# EAGLE board (Eagle)PowerUnit-Bseries(ver1.0)_bak (EAGLE 9.6.2)

Size 100 x 100 mm. Coordinates in mm from the lower left corner, seen from the top.
Outline: 0,0 100,0 100,100 0,100 0,0
Copper layers (1*16): Top 0.035559375mm / dielectric 1.6mm / Bottom 0.035559375mm
Design rules "jlcpcb2layer": minimum track width 5mil, minimum drill 12mil, track to track 5mil, track to pad 5mil, pad to pad 5mil, via to via 5mil, smd to smd 5mil, copper to edge 8mil, drill to drill 6mil, minimum pad ring 5mil, minimum via ring 3mil, stop-mask expansion 2.5mil, vias tented up to drill 0mil, thermal gap 10mil

## Footprints (pad centres in the part's own frame; a part is rotated, then mirrored left to right if it is on the bottom)
CS11029.5F100 = smd 1.5 x 1.3: 1 -3.95,2.25; 2 3.95,2.25; 3 -3.95,-2.25; 4 3.95,-2.25
1X02 = drill 1.016 long: 1 -1.27,0; 2 1.27,0
50ZLH1000MEFC16X25 = drill 1: A 3.75,0; C -3.75,0
GCM188L81H104KA57 = smd 0.7 x 0.8: P$1 -0.7,0; P$2 0.7,0
GRM32ER71H106KA12 = smd 1.2 x 2.3: L -1.7,0; R 1.7,0
A768EB566M1VLAE042 = smd 3.5 x 1.6: ANODE 2.7,0; CATHODE -2.7,0
3225M = smd 1.2 x 2.3: L -1.7,0; R 1.7,0
GRM0335C1H120GA01 = smd 0.25 x 0.3: 1 -0.275,0; 2 0.275,0
GRM21BC72A105KE01 = smd 0.8 x 1.4: P$1 -1,0; P$2 1,0
GRM31CR71H475KA12 = smd 1.2 x 1.7: 1 -1.6,0; 2 1.6,0
GRM0335C1E240GA01D = smd 0.35 x 0.4: 1 -0.325,0; 2 0.325,0
XT90PW-M = drill 4.1 pad 6.15: + 5.45,0; - -5.45,0 | drill 1.8 pad 2.7: P$3 -9.45,8.9; P$4 9.45,8.9
XT90PW-F = drill 4.1 pad 6.15: + -5.45,0; - 5.45,0 | drill 1.8 pad 2.7: P$3 -9.45,8.9; P$4 9.45,8.9
XT60PW-F = drill 2.9 pad 4.35: + -3.6,0; - 3.6,0 | drill 1.9 pad 2.85: P$3 -6.75,6; P$4 6.75,6
B2B-XH = drill 1 square: 1 1.27,0 | drill 1: 2 -1.27,0
GS1010FL = smd 0.78 x 1.22: A 3.48,0; C 0,0
10046971-019LF = drill 1.3: P$1 -30.48,-2.54; P$2 -27.94,-2.54; P$3 -25.4,-2.54; P$4 -22.86,-2.54; P$5 -20.32,-2.54; P$6 -17.78,-2.54; P$7 -15.24,-2.54; P$8 -12.7,-2.54; P$9 -10.16,-2.54; P$10 -7.62,-2.54; P$11 -5.08,-2.54; P$12 -2.54,-2.54; P$13 0,-2.54; P$14 2.54,-2.54; P$15 5.08,-2.54; P$16 7.62,-2.54; P$17 10.16,-2.54; P$18 12.7,-2.54; P$19 15.24,-2.54; P$20 17.78,-2.54; P$21 20.32,-2.54; P$22 22.86,-2.54; P$23 25.4,-2.54; P$24 27.94,-2.54; P$25 30.48,-2.54; P$26 30.48,2.54; P$27 27.94,2.54; P$28 25.4,2.54; P$29 22.86,2.54; P$30 20.32,2.54; P$31 17.78,2.54; P$32 15.24,2.54; P$33 12.7,2.54; P$34 10.16,2.54; P$35 7.62,2.54; P$36 5.08,2.54; P$37 2.54,2.54; P$38 0,2.54; P$39 -2.54,2.54; P$40 -5.08,2.54; P$41 -7.62,2.54; P$42 -10.16,2.54; P$43 -12.7,2.54; P$44 -15.24,2.54; P$45 -17.78,2.54; P$46 -20.32,2.54; P$47 -22.86,2.54; P$48 -25.4,2.54; P$49 -27.94,2.54; P$50 -30.48,2.54
BLM18KG121TN1D = smd 0.65 x 1.2: 1 -0.675,0; 2 0.675,0
3,2 = drill 3.197 pad 7.01: P$1 0,0 | hole 3.2: 0,0
TO-220AB-PUT = drill 0.8 long: D 0,-5.08; G -2.54,-5.08; S 2.54,-5.08 | smd 11.938 x 12.7: P$1 0,8.915
B5B-XH = drill 1 square: 1 5.08,0 | drill 1: 2 2.54,0; 3 0,0; 4 -2.54,0; 5 -5.08,0
NRS5030T4R7MMGJ = smd 1.5 x 4: L -1.8,0; R 1.8,0
LED5MM = drill 0.813 octagon: A -1.27,0; K 1.27,0
SML-E12V8WT86 = smd 0.8 x 0.8: A 0,1.65; K 0,0
P-SWITCH = drill 0.8: P$1 0,-2.54; P$2 0,7.62
SOT-23F = smd 0.8 x 0.9: D 0,1.05; G -0.95,-1.05; S 0.95,-1.05
0204/7 = drill 0.813 octagon: 1 -3.81,0; 2 3.81,0
CR0603 = smd 1 x 1.2: LEFT -1,0; RIGHT 1,0
B6B-XH = drill 1 square: 1 6.35,0 | drill 1: 2 3.81,0; 3 1.27,0; 4 -1.27,0; 5 -3.81,0; 6 -6.35,0
SS-12SDP2 = drill 0.8 pad 1.3: C 0,0; L -2.54,0; R 2.54,0
RDS-16S-1055-SMT-TR = smd 2.7 x 1: 1 -6.35,2.54; 2 6.35,-2.54; 4 -6.35,-2.54; 8 6.35,2.54; C1 -6.35,0; C2 6.35,0
2227MC-08-03 = drill 0.8: P$1 -3.81,-3.81; P$2 -1.27,-3.81; P$3 1.27,-3.81; P$4 3.81,-3.81; P$5 3.81,3.81; P$6 1.27,3.81; P$7 -1.27,3.81; P$8 -3.81,3.81
STM32F446XC = smd 0.3 x 1.2: P1 -3.75,-5.75; P2 -3.25,-5.75; P3 -2.75,-5.75; P4 -2.25,-5.75; P5 -1.75,-5.75; P6 -1.25,-5.75; P7 -0.75,-5.75; P8 -0.25,-5.75; P9 0.25,-5.75; P10 0.75,-5.75; P11 1.25,-5.75; P12 1.75,-5.75; P13 2.25,-5.75; P14 2.75,-5.75; P15 3.25,-5.75; P16 3.75,-5.75; P33 3.75,5.75; P34 3.25,5.75; P35 2.75,5.75; P36 2.25,5.75; P37 1.75,5.75; P38 1.25,5.75; P39 0.75,5.75; P40 0.25,5.75; P41 -0.25,5.75; P42 -0.75,5.75; P43 -1.25,5.75; P44 -1.75,5.75; P45 -2.25,5.75; P46 -2.75,5.75; P47 -3.25,5.75; P48 -3.75,5.75 | smd 1.2 x 0.3: P17 5.75,-3.75; P18 5.75,-3.25; P19 5.75,-2.75; P20 5.75,-2.25; P21 5.75,-1.75; P22 5.75,-1.25; P23 5.75,-0.75; P24 5.75,-0.25; P25 5.75,0.25; P26 5.75,0.75; P27 5.75,1.25; P28 5.75,1.75; P29 5.75,2.25; P30 5.75,2.75; P31 5.75,3.25; P32 5.75,3.75; P49 -5.75,3.75; P50 -5.75,3.25; P51 -5.75,2.75; P52 -5.75,2.25; P53 -5.75,1.75; P54 -5.75,1.25; P55 -5.75,0.75; P56 -5.75,0.25; P57 -5.75,-0.25; P58 -5.75,-0.75; P59 -5.75,-1.25; P60 -5.75,-1.75; P61 -5.75,-2.25; P62 -5.75,-2.75; P63 -5.75,-3.25; P64 -5.75,-3.75
MCP2517FD = smd 0.6 x 1.55: CLKO/SOF 2.54,0; INT 3.81,0; INT0/GPIO0 6.35,5.4; INT1/GPIO1 7.62,5.4; NCS 1.27,5.4; OSC1 6.35,0; OSC2 5.08,0; RXCAN 1.27,0; SCK 5.08,5.4; SDI 3.81,5.4; SDO 2.54,5.4; TXCAN 0,0; VDD 0,5.4; VSS 7.62,0
MSOP-10 = smd 0.3 x 1.35: 3V3 -1,1.975; CTS# 1,-1.975; GND 0,-1.975; RTS# 0.5,-1.975; RXD -0.5,1.975; TNOW 1,1.975; TXD 0,1.975; UD+ -1,-1.975; UD- -0.5,-1.975; VCC 0.5,1.975
AP63203WU-7 = smd 0.7 x 1: BST -0.95,1.099; EN 0,-1.099; FB -0.95,-1.099; GND 0.95,1.099; SW 0,1.099; VIN 0.95,-1.099
SOT25 = smd 0.6 x 1.05: GND 0,-1.35; IN+ -0.95,-1.35; IN- 0.95,-1.35; OUTPUT 0.95,1.35; VCC -0.95,1.35
MCP2558FD = smd 0.25 x 0.85: CANH -0.25,1.45; CANL 0.25,1.45; RXD 0.75,-1.45; S -0.75,1.45; TXD -0.75,-1.45; VDD 0.25,-1.45; VIO 0.75,1.45; VSS -0.25,-1.45 | smd 1.65 x 1.8: EP 0,0
AZ1117C = smd 1.2 x 2.2: GND -2.3,-3.1; INPUT 2.3,-3.1; OUTPUT 0,-3.1 | smd 3.5 x 2.2: VOUT 0,3.1
5077CR-16SMC2-BK-TR = smd 0.3 x 1.1: CC1 -1.25,4.74; CC2 1.75,4.74; DN1 0.25,4.74; DN2 -0.75,4.74; DP1 -0.25,4.74; DP2 0.75,4.74; SBU1 1.25,4.74; SBU2 -1.75,4.74 | smd 0.6 x 1.1: GND1 -3.2,4.74; GND2 3.2,4.74; VBUS1 -2.4,4.74; VBUS2 2.4,4.74 | smd 1.1 x 2.1: SHIELD1 -4.32,4.18; SHIELD2 -4.32,0; SHIELD3 4.32,0; SHIELD4 4.32,4.18 | hole 0.6: -2.89,3.68; 2.89,3.68
XRCGB40M000F4M00R0 = smd 0.75 x 0.7: 1 -0.675,-0.5; 2 0.675,0.5; NC1 -0.675,0.5; NC2 0.675,-0.5
RH100-24.000-18-1020-EXT-TR = smd 1.4 x 1.1: 1 -1.1,-0.8; 2 1.1,-0.8; 3 1.1,0.8; 4 -1.1,0.8
32.768K12.5PI/MC306 = smd 1.3 x 1.9: 1 -2.75,-1.6; 2 2.75,-1.6; 3 2.75,1.6; 4 -2.75,1.6

## Placement (x,y rotation side)
B1  CS11029.5F100  [CS11029.5F100]  93.98,62.23 0 top
BOOTMODE  [1X02]  92.71,69.85 0 top
C1  50ZLH1000MEFC16X25  [50ZLH1000MEFC16X25]  -68.58,11.43 0 top  (outside the outline)
C2  GCM188L81H104KA57  [GCM188L81H104KA57]  -19.05,113.03 0 top  (outside the outline)
C3  GCM188L81H104KA57  [GCM188L81H104KA57]  24.13,45.72 0 top
C4  GRM32ER71H106KA12  [GRM32ER71H106KA12]  60.96,60.96 0 top
C5  GRM32ER71H106KA12  [GRM32ER71H106KA12]  60.96,57.15 0 top
C6  GCM188L81H104KA57  [GCM188L81H104KA57]  13.97,46.99 0 top
C7  A768EB566M1VLAE042  [A768EB566M1VLAE042]  21.59,62.23 90 top
C8  GCM188L81H104KA57  [GCM188L81H104KA57]  63.5,63.5 0 top
C9  GRM32ER71E226KE15  [3225M]  35.56,57.15 0 top
C10  GCM188L81H104KA57  [GCM188L81H104KA57]  34.29,54.61 0 top
C11  GCM188L81H104KA57  [GCM188L81H104KA57]  34.29,52.07 0 top
C12  GRM32ER71E226KE15  [3225M]  35.56,48.26 0 top
C13  GCM188L81H104KA57  [GCM188L81H104KA57]  54.61,64.77 0 top
C14  GCM188L81H104KA57  [GCM188L81H104KA57]  69.85,26.67 0 top
C15  GCM188L81H104KA57  [GCM188L81H104KA57]  69.85,24.13 0 top
C16  GRM0335C1H120GA01  [GRM0335C1H120GA01]  71.12,21.59 0 top
C17  GRM0335C1H120GA01  [GRM0335C1H120GA01]  71.12,19.05 0 top
C18  GCM188L81H104KA57  [GCM188L81H104KA57]  85.09,57.15 0 top
C19  GCM188L81H104KA57  [GCM188L81H104KA57]  85.09,54.61 0 top
C20  GCM188L81H104KA57  [GCM188L81H104KA57]  85.09,52.07 0 top
C21  GCM188L81H104KA57  [GCM188L81H104KA57]  85.09,49.53 0 top
C22  GCM188L81H104KA57  [GCM188L81H104KA57]  53.34,55.88 0 top
C23  GRM21BC72A105KE01  [GRM21BC72A105KE01]  54.61,53.34 0 top
C24  GRM31CR71H475KA12  [GRM31CR71H475KA12]  91.44,77.47 0 top
C25  GCM188L81H104KA57  [GCM188L81H104KA57]  90.17,74.93 0 top
C26  GCM188L81H104KA57  [GCM188L81H104KA57]  90.17,57.15 0 top
C27  GRM0335C1E240GA01D  [GRM0335C1E240GA01D]  125.73,74.93 0 top  (outside the outline)
C28  GRM0335C1E240GA01D  [GRM0335C1E240GA01D]  125.73,72.39 0 top  (outside the outline)
C29  GRM0335C1H150FA01D  [GRM0335C1H120GA01]  115.57,66.04 0 top  (outside the outline)
C30  GRM0335C1H150FA01D  [GRM0335C1H120GA01]  115.57,63.5 0 top  (outside the outline)
C31  GCM188L81H104KA57  [GCM188L81H104KA57]  115.57,25.4 0 top  (outside the outline)
C32  GCM188L81H104KA57  [GCM188L81H104KA57]  115.57,22.86 0 top  (outside the outline)
C33  GCM188L81H104KA57  [GCM188L81H104KA57]  115.57,20.32 0 top  (outside the outline)
C34  GCM188L81H104KA57  [GCM188L81H104KA57]  115.57,17.78 0 top  (outside the outline)
CON1  XT90PW-M  [XT90PW-M]  19.05,22.86 180 top
CON2  XT90PW-F  [XT90PW-F]  43.18,22.86 180 top
CON3  XT60PW-F  [XT60PW-F]  15.24,83.82 0 top
CON4  XT60PW-F  [XT60PW-F]  34.29,83.82 0 top
CON5  XT60PW-F  [XT60PW-F]  53.34,83.82 0 top
CON6  XT60PW-F  [XT60PW-F]  72.39,83.82 0 top
CTRL1  02-JST  [B2B-XH]  -46.99,88.9 0 top  (outside the outline)
CTRL2  02-JST  [B2B-XH]  -55.88,88.9 0 top  (outside the outline)
D1  GS1010FL  [GS1010FL]  5.08,53.34 0 top
D2  GS1010FL  [GS1010FL]  5.08,50.8 0 top
ECHO  [1X02]  26.67,49.53 0 top
EDGE1  10046971-019LF-FEMAL  [10046971-019LF]  -33.02,43.18 0 top
EDGE2  10046971-019LF-FEMAL  [10046971-019LF]  -33.02,54.61 0 top
EDGE3  10046971-019LF-FEMAL  [10046971-019LF]  -33.02,66.04 0 top
EDGE4  10046971-019LF-FEMAL  [10046971-019LF]  -33.02,77.47 0 top
FB1  BLM18KG121TN1D  [BLM18KG121TN1D]  54.61,58.42 0 top
GND  [1X02]  16.51,50.8 0 top
H1  MOUNT-HOLE3.2(NORESIST)  [3,2]  80.01,55.88 0 top
H2  MOUNT-HOLE3.2(NORESIST)  [3,2]  80.01,48.26 0 top
H3  MOUNT-HOLE3.2(NORESIST)  [3,2]  80.01,40.64 0 top
H4  MOUNT-HOLE3.2(NORESIST)  [3,2]  80.01,33.02 0 top
IRLB-1  IRLB3813_2  [TO-220AB-PUT]  -3.81,10.16 0 top
IRLB-2  IRLB3813_2  [TO-220AB-PUT]  -19.05,10.16 0 top  (outside the outline)
IRLB-3  IRLB3813_2  [TO-220AB-PUT]  -34.29,10.16 0 top  (outside the outline)
IRLB-4  IRLB3813_2  [TO-220AB-PUT]  -49.53,10.16 0 top  (outside the outline)
JP1  [1X02]  -38.1,106.68 0 top  (outside the outline)
JP2  [B5B-XH]  121.92,55.88 0 top  (outside the outline)
JP3  [B5B-XH]  121.92,46.99 0 top  (outside the outline)
JP4  [B5B-XH]  121.92,38.1 0 top  (outside the outline)
JP5  [B5B-XH]  121.92,29.21 0 top  (outside the outline)
L1  4.7uH  [NRS5030T4R7MMGJ]  29.21,60.96 0 top
LED1  [LED5MM]  -6.35,107.95 0 top  (outside the outline)
LED2  [LED5MM]  -19.05,107.95 0 top  (outside the outline)
LED3  [LED5MM]  -31.75,107.95 0 top  (outside the outline)
LED4  SMLE13BC8T  [SML-E12V8WT86]  21.59,43.18 0 top
P-1  P-SWITCH  [P-SWITCH]  -22.86,29.21 0 top  (outside the outline)
P-2  P-SWITCH  [P-SWITCH]  -30.48,29.21 0 top  (outside the outline)
P-3  P-SWITCH  [P-SWITCH]  -38.1,29.21 0 top  (outside the outline)
P-4  P-SWITCH  [P-SWITCH]  -45.72,29.21 0 top  (outside the outline)
P-5  P-SWITCH  [P-SWITCH]  -53.34,29.21 0 top  (outside the outline)
P-6  P-SWITCH  [P-SWITCH]  -60.96,29.21 0 top  (outside the outline)
P-7  P-SWITCH  [P-SWITCH]  -68.58,29.21 0 top  (outside the outline)
P-8  P-SWITCH  [P-SWITCH]  -76.2,29.21 0 top  (outside the outline)
POW  02-JST  [B2B-XH]  63.5,12.7 0 top
POW1  [1X02]  83.82,80.01 0 top
Q2  SSM3J332R  [SOT-23F]  64.77,59.69 0 top
Q4  SSM3J332R  [SOT-23F]  68.58,41.91 0 top
R1  100  [0204/7]  -46.99,106.68 0 top  (outside the outline)
R2  680  [0204/7]  -57.15,106.68 0 top  (outside the outline)
R3  1kΩ  [0204/7]  -67.31,106.68 0 top  (outside the outline)
R4  10kΩ  [0204/7]  -77.47,106.68 0 top  (outside the outline)
R5  680  [0204/7]  -2.54,113.03 0 top  (outside the outline)
R6  1kΩ  [0204/7]  -12.7,113.03 0 top  (outside the outline)
R7  120Ω  [CR0603]  12.7,31.75 0 top
R8  [CR0603]  12.7,29.21 0 top
R9  [CR0603]  12.7,26.67 0 top
R10  150Ω  [CR0603]  25.4,43.18 0 top
R11  10k  [CR0603]  86.36,46.99 0 top
R12  2.4Meg  [CR0603]  91.44,54.61 0 top
R13  2.4Meg  [CR0603]  91.44,52.07 0 top
R14  0  [CR0603]  91.44,49.53 0 top
R15  100k  [CR0603]  91.44,46.99 0 top
R16  0  [CR0603]  91.44,44.45 0 top
R17  0  [CR0603]  91.44,41.91 0 top
R18  12k  [CR0603]  38.1,63.5 0 top
R19  3k  [CR0603]  38.1,60.96 0 top
R20  10k  [CR0603]  64.77,50.8 0 top
R21  10k  [CR0603]  68.58,50.8 0 top
R22  10k  [CR0603]  72.39,50.8 0 top
R23  10k  [CR0603]  64.77,48.26 0 top
R24  10k  [CR0603]  68.58,48.26 0 top
R25  0  [CR0603]  91.44,39.37 0 top
R26  0  [CR0603]  91.44,36.83 0 top
R27  0  [CR0603]  125.73,77.47 0 top  (outside the outline)
R28  0  [CR0603]  116.84,68.58 0 top  (outside the outline)
R29  10k  [CR0603]  -87.63,-20.32 0 top  (outside the outline)
R30  10k  [CR0603]  -87.63,-22.86 0 top  (outside the outline)
R31  10k  [CR0603]  -87.63,-25.4 0 top  (outside the outline)
R32  100k  [CR0603]  72.39,48.26 0 top
R33  0  [CR0603]  64.77,45.72 0 top
R34  10k  [CR0603]  64.77,36.83 0 top
R35  10k  [CR0603]  68.58,36.83 0 top
R36  10k  [CR0603]  72.39,36.83 0 top
R37  10k  [CR0603]  64.77,34.29 0 top
R38  10k  [CR0603]  68.58,34.29 0 top
R39  100k  [CR0603]  72.39,34.29 0 top
R40  0  [CR0603]  64.77,31.75 0 top
R41  10k  [CR0603]  -87.63,-27.94 0 top  (outside the outline)
STLINK  [B6B-XH]  58.42,71.12 0 top
SW1  SS-12SDP2  [SS-12SDP2]  41.91,31.75 0 top
SW2  RDS-16S-1055-SMT-TR  [RDS-16S-1055-SMT-TR]  -82.55,-12.7 0 top  (outside the outline)
SWITCH  02-JST  [B2B-XH]  -27.94,88.9 0 top  (outside the outline)
THRU1  02-JST  [B2B-XH]  -38.1,88.9 0 top  (outside the outline)
TLP1  2227MC-08-03  [2227MC-08-03]  -85.09,31.75 0 top  (outside the outline)
U1  LQFP64  [STM32F446XC]  43.18,53.34 0 top
U2  MCP2517FD  [MCP2517FD]  34.29,38.1 0 top
U3  CH340E  [MSOP-10]  54.61,49.53 0 top
U5  AP63205WU-7  [AP63203WU-7]  25.4,55.88 0 top
U7  AP331AWG-7  [SOT25]  64.77,54.61 0 top
U9  AP331AWG-7  [SOT25]  64.77,40.64 0 top
U$1  MCP2558FD  [MCP2558FD]  44.45,41.91 0 top
U$4  AZ1117CH-3.3TRG1  [AZ1117C]  8.89,44.45 0 top
USB1  5077CR-16SMC2-BK-TR  [5077CR-16SMC2-BK-TR]  54.61,38.1 0 top
X1  XRCGB40M000F4M00R0  [XRCGB40M000F4M00R0]  44.45,36.83 0 top
X2  RH100-24.000-18-1020-EXT-TR  [RH100-24.000-18-1020-EXT-TR]  92.71,31.75 0 top
X3  32.768K12.5PI/MC306  [32.768K12.5PI/MC306]  118.11,76.2 0 top  (outside the outline)

## Library data of the parts
B1 = CS11029.5F100
BOOTMODE ECHO GND JP1 POW1 = pinhead
C1 = 50ZLH1000MEFC16X25(1000uF)
C2 C3 C6 C8 C10 C11 C13-C15 C18-C22 C25 C26 C31-C34 = GCM188L81H104K57(0.1uF)
C4 C5 = GRM32ER71H106KA12
C7 = A768EB566M1VLAE042
C9 C12 = GRM32ER71E226KE15
C16 C17 = GRM0335C1H120GA01
C23 = GRM21BC72A105KE01(1uF)
C24 = GRM31CR71H475KA12
C27 C28 = GRM0335C1E240GA01D
C29 C30 = GRM0335C1H150FA01D
CON1-CON6 = amass
CTRL1 CTRL2 JP2-JP5 POW STLINK SWITCH THRU1 = con-jst-xh
D1 D2 = GS1010FL
EDGE1-EDGE4 = 10046971-019LF-FEMAL
FB1 = BLM18KG121TN1D
H1-H4 = MOUNT-HOLE3.2(NORESIST)
IRLB-1-IRLB-4 P-1-P-8 = OKUDA_libraries
L1 = NRS5030T4R7MMGJ
LED1-LED3 = led
LED4 = SML-E12V8WT86
Q2 Q4 = SSM3J332R
R1-R6 = rcl; SPICEPREFIX: R
R7-R41 = CR0603
SW1 = SS-12SDP2
SW2 = RDS-16S-1055-SMT-TR
TLP1 = TLP250H
U1 = STM32F446xC
U2 = MCP2517FD
U3 = CH340E
U5 = AP63205WU-7
U7 U9 = AP331AWG-7
U$1 = MCP2558FD
U$4 = AZ1117CH-3.3TRG1
USB1 = 5077CR-16SMC2-BK-TR
X1 = XRCGB40M000F4M00R0
X2 = RH100-24.000-18-1020-EXT-TR
X3 = 32.768K12.5PI

## Nets
+3V3: BOOTMODE.2 C3.P$2 C11.P$1 C12.L C13.P$2 C15.P$1 C18.P$1 C19.P$1 C20.P$1 C21.P$1 C25.P$1 FB1.1 STLINK.6 SW2.C1 SW2.C2 U1.P1 U1.P19 U1.P32 U1.P48 U1.P64 U2.VDD U3.3V3 U3.VCC U$1.VIO U$4.OUTPUT U$4.VOUT
+5V: C9.L C10.P$1 C14.P$1 C31.P$1 C32.P$1 C33.P$1 C34.P$1 JP2.4 JP3.4 JP4.4 JP5.4 Q2.S Q4.S R20.LEFT R23.RIGHT R32.RIGHT R34.LEFT R37.RIGHT R39.RIGHT U7.VCC U9.VCC U$1.VDD U$4.INPUT
BOOT0: BOOTMODE.1 R11.LEFT U1.P60
CANH: R7.RIGHT U$1.CANH
CANL: SW1.C U$1.CANL
CS: U1.P33 U2.NCS
DIP_SW1: R41.RIGHT SW2.1
DIP_SW2: R31.RIGHT SW2.2
DIP_SW3: R25.RIGHT R30.RIGHT SW2.4 U1.P52
DIP_SW4: R26.RIGHT R29.RIGHT SW2.8 U1.P51
DIR1: EDGE1.P$26 U1.P24
DIR2: EDGE2.P$26 U1.P25
DIR3: EDGE3.P$26 U1.P26
DIR4: EDGE4.P$26 U1.P27
ENC1_A: JP2.3 U1.P41
ENC1_B: JP2.5 U1.P42
ENC2_A: JP4.3 U1.P22
ENC2_B: JP4.5 U1.P23
ENC3_A: JP3.3 U1.P58
ENC3_B: JP3.5 U1.P59
ENC4_A: JP5.3 U1.P37
ENC4_B: JP5.5 U1.P38
GND: C1.C C2.P$2 C3.P$1 CON1.- CON2.- EDGE1.P$24 EDGE2.P$24 EDGE3.P$24 EDGE4.P$24 GND.2 H1.P$1 H2.P$1 H3.P$1 H4.P$1 IRLB-1.S IRLB-2.S IRLB-3.S IRLB-4.S JP1.1 LED1.K LED2.K R4.2 STLINK.4 TLP1.P$5
GND2: B1.3 C4.R C5.R C7.CATHODE C8.P$2 C9.R C10.P$2 C11.P$2 C12.R C13.P$1 C14.P$2 C15.P$2 C16.2 C17.2 C18.P$2 C19.P$2 C20.P$2 C21.P$2 C22.P$2 C23.P$2 C24.2 C25.P$2 C26.P$1 C26.P$2 C27.1 C28.1 C29.1 C30.1 C31.P$2 C32.P$2 C33.P$2 C34.P$2 GND.1 JP2.1 JP3.1 JP4.1 JP5.1 LED4.K POW.1 R8.LEFT R9.LEFT R11.RIGHT R15.LEFT R19.LEFT R22.LEFT R24.LEFT R29.LEFT R30.LEFT R31.LEFT R36.LEFT R38.LEFT R41.LEFT U1.P12 U1.P18 U1.P31 U1.P47 U1.P63 U2.VSS U3.GND U5.GND U7.GND U9.GND U$1.EP U$1.VSS U$4.GND USB1.GND1 USB1.GND2 USB1.SHIELD1 USB1.SHIELD2 USB1.SHIELD3 USB1.SHIELD4 X2.2 X2.4
LED: R1.1
MISO: U1.P35 U2.SDO
MOSI: U1.P36 U2.SDI
N$1: CON3.- EDGE1.P$6 EDGE1.P$7 EDGE1.P$8 EDGE1.P$9 EDGE1.P$10 EDGE1.P$11 EDGE1.P$40 EDGE1.P$41 EDGE1.P$42 EDGE1.P$43 EDGE1.P$44
N$2: CON4.- EDGE2.P$6 EDGE2.P$7 EDGE2.P$8 EDGE2.P$9 EDGE2.P$10 EDGE2.P$11 EDGE2.P$40 EDGE2.P$41 EDGE2.P$42 EDGE2.P$43 EDGE2.P$44
N$3: LED3.A R5.1
N$4: CON3.+ EDGE1.P$1 EDGE1.P$2 EDGE1.P$3 EDGE1.P$4 EDGE1.P$5 EDGE1.P$45 EDGE1.P$46 EDGE1.P$47 EDGE1.P$48 EDGE1.P$49 EDGE1.P$50
N$5: CON4.+ EDGE2.P$1 EDGE2.P$2 EDGE2.P$3 EDGE2.P$4 EDGE2.P$5 EDGE2.P$45 EDGE2.P$46 EDGE2.P$47 EDGE2.P$48 EDGE2.P$49 EDGE2.P$50
N$6: CON5.+ EDGE3.P$1 EDGE3.P$2 EDGE3.P$3 EDGE3.P$4 EDGE3.P$5 EDGE3.P$45 EDGE3.P$46 EDGE3.P$47 EDGE3.P$48 EDGE3.P$49 EDGE3.P$50
N$7: IRLB-1.P$1 P-1.P$2 P-2.P$2
N$8: EDGE4.P$28 EDGE4.P$29 EDGE4.P$30 EDGE4.P$31 EDGE4.P$32 EDGE4.P$33 EDGE4.P$34 EDGE4.P$35 EDGE4.P$36 EDGE4.P$37 EDGE4.P$38 EDGE4.P$39 P-7.P$1 P-8.P$1
N$9: CON5.- EDGE3.P$6 EDGE3.P$7 EDGE3.P$8 EDGE3.P$9 EDGE3.P$10 EDGE3.P$11 EDGE3.P$40 EDGE3.P$41 EDGE3.P$42 EDGE3.P$43 EDGE3.P$44
N$10: CON6.+ EDGE4.P$1 EDGE4.P$2 EDGE4.P$3 EDGE4.P$4 EDGE4.P$5 EDGE4.P$45 EDGE4.P$46 EDGE4.P$47 EDGE4.P$48 EDGE4.P$49 EDGE4.P$50
N$11: IRLB-2.P$1 P-3.P$2 P-4.P$2
N$12: IRLB-4.P$1 P-7.P$2 P-8.P$2
N$13: CON6.- EDGE4.P$6 EDGE4.P$7 EDGE4.P$8 EDGE4.P$9 EDGE4.P$10 EDGE4.P$11 EDGE4.P$40 EDGE4.P$41 EDGE4.P$42 EDGE4.P$43 EDGE4.P$44
N$14: EDGE3.P$28 EDGE3.P$29 EDGE3.P$30 EDGE3.P$31 EDGE3.P$32 EDGE3.P$33 EDGE3.P$34 EDGE3.P$35 EDGE3.P$36 EDGE3.P$37 EDGE3.P$38 EDGE3.P$39 P-5.P$1 P-6.P$1
N$15: IRLB-3.P$1 P-5.P$2 P-6.P$2
N$16: R6.2 TLP1.P$3
N$17: LED1.A R2.1
N$18: LED2.A R1.2
N$19: CTRL1.2 CTRL2.2 SWITCH.1 THRU1.2 TLP1.P$2
N$20: R3.1 TLP1.P$6
N$21: CTRL1.1 CTRL2.1 JP1.2 R6.1 THRU1.1
N$22: IRLB-1.G IRLB-2.G IRLB-3.G IRLB-4.G R3.2 R4.1
N$23: R7.LEFT SW1.R
N$24: IRLB-2.D LED3.K
N$25: EDGE1.P$28 EDGE1.P$29 EDGE1.P$30 EDGE1.P$31 EDGE1.P$32 EDGE1.P$33 EDGE1.P$34 EDGE1.P$35 EDGE1.P$36 EDGE1.P$37 EDGE1.P$38 EDGE1.P$39 P-1.P$1 P-2.P$1
N$26: EDGE2.P$28 EDGE2.P$29 EDGE2.P$30 EDGE2.P$31 EDGE2.P$32 EDGE2.P$33 EDGE2.P$34 EDGE2.P$35 EDGE2.P$36 EDGE2.P$37 EDGE2.P$38 EDGE2.P$39 P-3.P$1 P-4.P$1
N$27: U2.TXCAN U$1.TXD
N$28: U2.RXCAN U$1.RXD
N$29: R8.RIGHT USB1.CC2
N$30: R9.RIGHT USB1.CC1
N$31: U3.UD+ USB1.DP1 USB1.DP2
N$32: U3.UD- USB1.DN1 USB1.DN2
N$33: R10.RIGHT U3.TNOW
N$34: LED4.A R10.LEFT
N$35: D1.A POW1.2
N$36: R18.LEFT R19.RIGHT U5.EN
N$37: D2.A POW.2
N$38: R14.LEFT U2.OSC2
N$39: C17.1 U2.OSC1 X1.2
N$40: C6.P$2 L1.L U5.SW
N$41: C6.P$1 U5.BST
N$42: C16.1 R14.RIGHT X1.1
N$43: Q2.G R12.LEFT R20.RIGHT R32.LEFT R33.LEFT R33.RIGHT U7.OUTPUT
N$44: R16.LEFT U1.P16
N$45: R17.LEFT U1.P17
N$46: C22.P$1 C23.P$1 FB1.2 U1.P13
N$47: R12.RIGHT R23.LEFT R24.RIGHT U7.IN+
N$48: C24.1 U1.P30
N$49: C27.2 U1.P5 X2.1
N$50: R28.RIGHT U1.P4
N$51: Q4.G R13.LEFT R34.RIGHT R39.LEFT R40.LEFT R40.RIGHT U9.OUTPUT
N$52: R27.RIGHT U1.P6
N$53: R13.RIGHT R37.LEFT R38.RIGHT U9.IN+
N$54: C28.2 R27.LEFT X2.3
N$55: C7.ANODE L1.R Q2.D R21.RIGHT U5.FB
N$56: C30.2 R28.LEFT X3.1
N$57: C29.2 U1.P3 X3.4
NRST: B1.1 STLINK.2 U1.P7
PWM1: EDGE1.P$25 U1.P50
PWM2: EDGE2.P$25 U1.P15
PWM3: EDGE3.P$25 U1.P29
PWM4: EDGE4.P$25 R15.RIGHT U1.P28
SCK: U1.P34 U2.SCK
SWCLK: STLINK.5 U1.P49
SWDIO: STLINK.3 U1.P46
SWO: STLINK.1 U1.P55
U5V: Q4.D R35.RIGHT USB1.VBUS1 USB1.VBUS2
USART_RX: ECHO.1 R17.RIGHT R26.LEFT U3.TXD
USART_TX: ECHO.2 R16.RIGHT R25.LEFT U3.RXD
V+: C4.L C5.L C8.P$1 D1.C D2.C R18.RIGHT U5.VIN
VCC: C1.A C2.P$1 CON1.+ CON2.+ EDGE1.P$12 EDGE1.P$13 EDGE1.P$14 EDGE1.P$15 EDGE1.P$16 EDGE1.P$17 EDGE1.P$18 EDGE1.P$19 EDGE1.P$20 EDGE1.P$21 EDGE1.P$22 EDGE1.P$23 EDGE2.P$12 EDGE2.P$13 EDGE2.P$14 EDGE2.P$15 EDGE2.P$16 EDGE2.P$17 EDGE2.P$18 EDGE2.P$19 EDGE2.P$20 EDGE2.P$21 EDGE2.P$22 EDGE2.P$23 EDGE3.P$12 EDGE3.P$13 EDGE3.P$14 EDGE3.P$15 EDGE3.P$16 EDGE3.P$17 EDGE3.P$18 EDGE3.P$19 EDGE3.P$20 EDGE3.P$21 EDGE3.P$22 EDGE3.P$23 EDGE4.P$12 EDGE4.P$13 EDGE4.P$14 EDGE4.P$15 EDGE4.P$16 EDGE4.P$17 EDGE4.P$18 EDGE4.P$19 EDGE4.P$20 EDGE4.P$21 EDGE4.P$22 EDGE4.P$23 POW1.1 R2.2 R5.2 SWITCH.2 TLP1.P$8
VCC2: EDGE1.P$27 EDGE2.P$27 EDGE3.P$27 EDGE4.P$27
VM1: R21.LEFT R22.RIGHT U7.IN-
VM2: R35.LEFT R36.RIGHT U9.IN-

## Tracks (layer width: path | path; a pad name or v marks a point on that pad's centre or on a via)
+3V3  (25 unrouted)
+5V  (22 unrouted)
BOOT0  (2 unrouted)
CANH  (1 unrouted)
CANL  (1 unrouted)
CS  (1 unrouted)
DIP_SW1  (1 unrouted)
DIP_SW2  (1 unrouted)
DIP_SW3  (3 unrouted)
DIP_SW4  (3 unrouted)
DIR1  (1 unrouted)
DIR2  (1 unrouted)
DIR3  (1 unrouted)
DIR4  (1 unrouted)
ENC1_A  (1 unrouted)
ENC1_B  (1 unrouted)
ENC2_A  (1 unrouted)
ENC2_B  (1 unrouted)
ENC3_A  (1 unrouted)
ENC3_B  (1 unrouted)
ENC4_A  (1 unrouted)
ENC4_B  (1 unrouted)
GND  (23 unrouted)
GND2  (72 unrouted)
MISO  (1 unrouted)
MOSI  (1 unrouted)
N$1  (11 unrouted)
N$2  (11 unrouted)
N$3  (1 unrouted)
N$4  (11 unrouted)
N$5  (11 unrouted)
N$6  (11 unrouted)
N$7  (2 unrouted)
N$8  (13 unrouted)
N$9  (11 unrouted)
N$10  (11 unrouted)
N$11  (2 unrouted)
N$12  (2 unrouted)
N$13  (11 unrouted)
N$14  (13 unrouted)
N$15  (2 unrouted)
N$16  (1 unrouted)
N$17  (1 unrouted)
N$18  (1 unrouted)
N$19  (4 unrouted)
N$20  (1 unrouted)
N$21  (4 unrouted)
N$22  (5 unrouted)
N$23  (1 unrouted)
N$24  (1 unrouted)
N$25  (13 unrouted)
N$26  (13 unrouted)
N$27  (1 unrouted)
N$28  (1 unrouted)
N$29  (1 unrouted)
N$30  (1 unrouted)
N$31  (2 unrouted)
N$32  (2 unrouted)
N$33  (1 unrouted)
N$34  (1 unrouted)
N$35  (1 unrouted)
N$36  (2 unrouted)
N$37  (1 unrouted)
N$38  (1 unrouted)
N$39  (2 unrouted)
N$40  (2 unrouted)
N$41  (1 unrouted)
N$42  (2 unrouted)
N$43  (6 unrouted)
N$44  (1 unrouted)
N$45  (1 unrouted)
N$46  (3 unrouted)
N$47  (3 unrouted)
N$48  (1 unrouted)
N$49  (2 unrouted)
N$50  (1 unrouted)
N$51  (6 unrouted)
N$52  (1 unrouted)
N$53  (3 unrouted)
N$54  (2 unrouted)
N$55  (4 unrouted)
N$56  (2 unrouted)
N$57  (2 unrouted)
NRST  (2 unrouted)
PWM1  (1 unrouted)
PWM2  (1 unrouted)
PWM3  (1 unrouted)
PWM4  (2 unrouted)
SCK  (1 unrouted)
SWCLK  (1 unrouted)
SWDIO  (1 unrouted)
SWO  (1 unrouted)
U5V  (3 unrouted)
USART_RX  (3 unrouted)
USART_TX  (3 unrouted)
V+  (6 unrouted)
VCC  (56 unrouted)
VCC2  (3 unrouted)
VM1  (2 unrouted)
VM2  (2 unrouted)